# Altium PCB PCB1.PcbDoc (part 1 of 2)
Units mm, origin at the board's own origin, x right, y up, seen from the top; angles counter-clockwise.
Board outline 125 x 72.5 mm, 4 copper layers (Top Layer, GND Plane, 3V3_Plane, Bottom Layer), stack 0.603 mm thick; 52 components, 52 nets, 236 pads, 121 vias.
Unrouted connection lines stored in the file: 4.
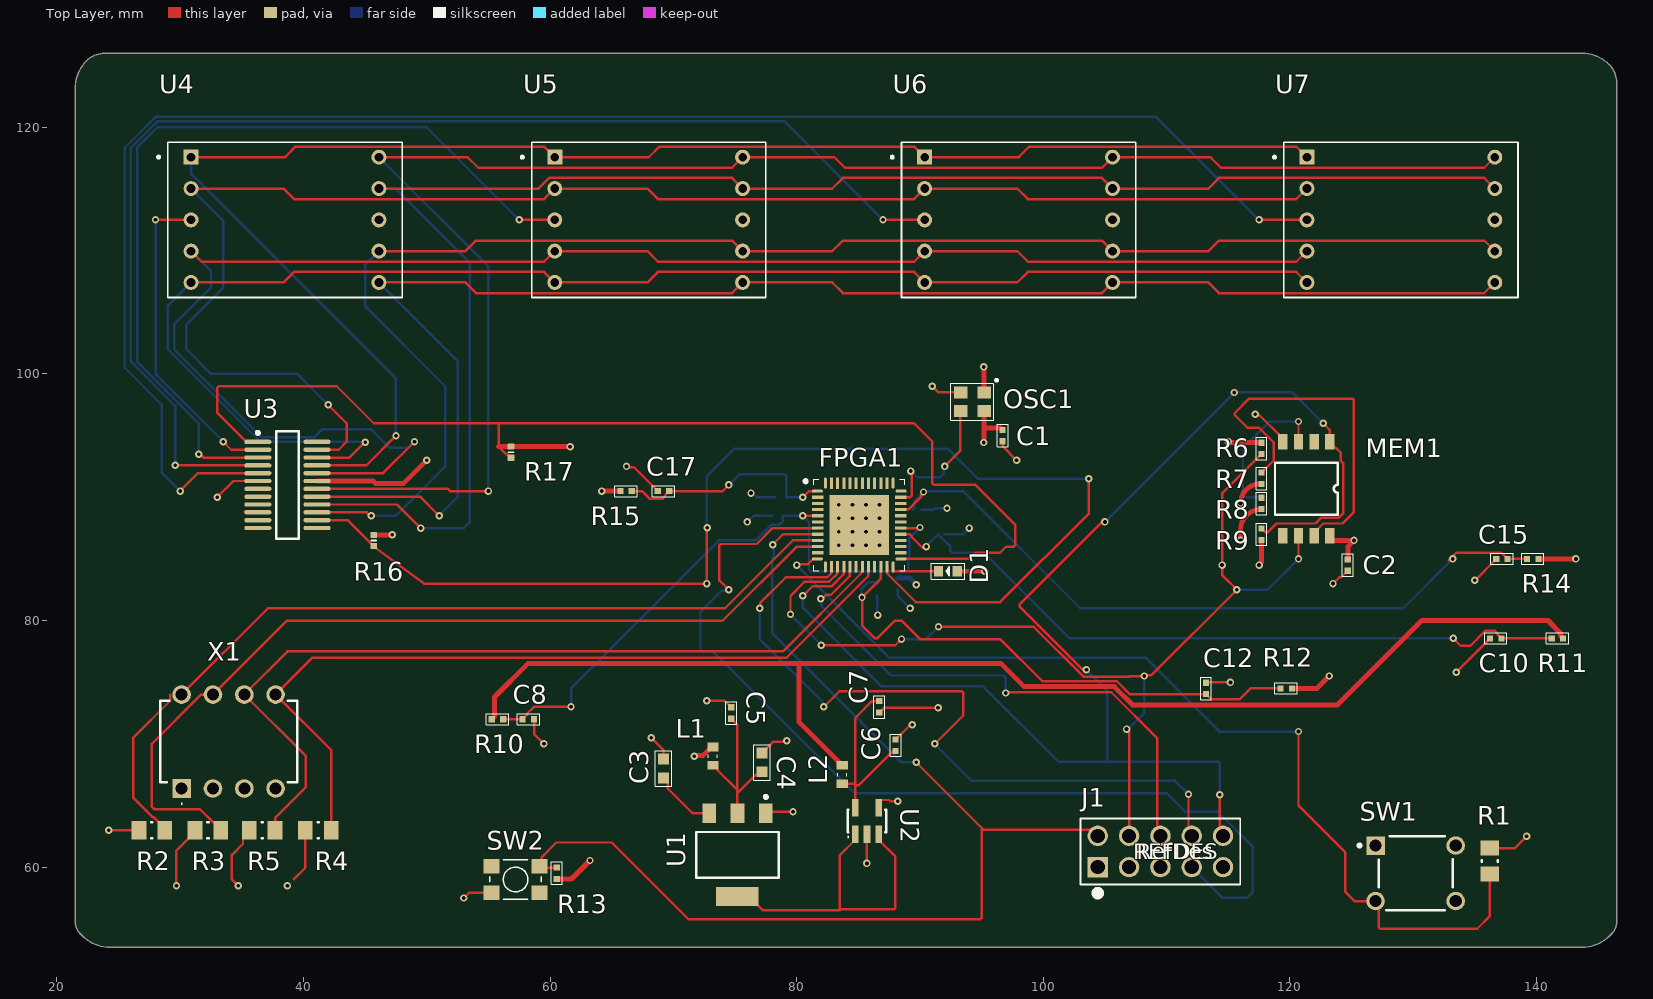
[diagram p0: Top Layer view]
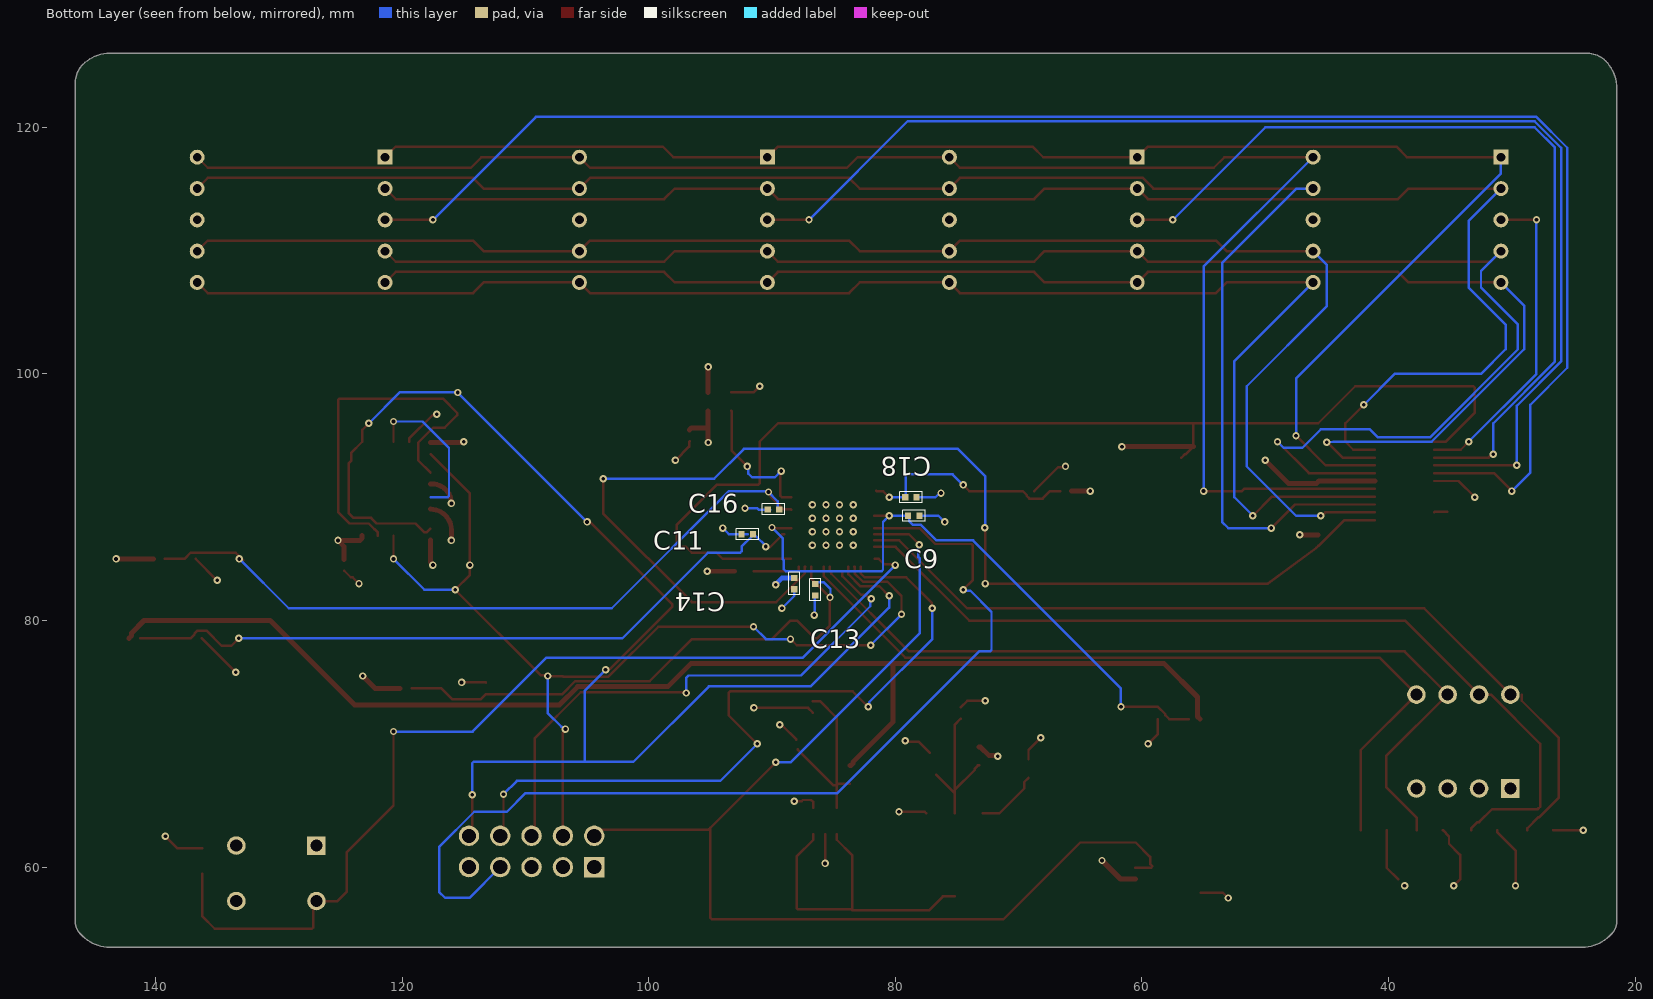
[diagram p1: Bottom Layer view, seen from below]
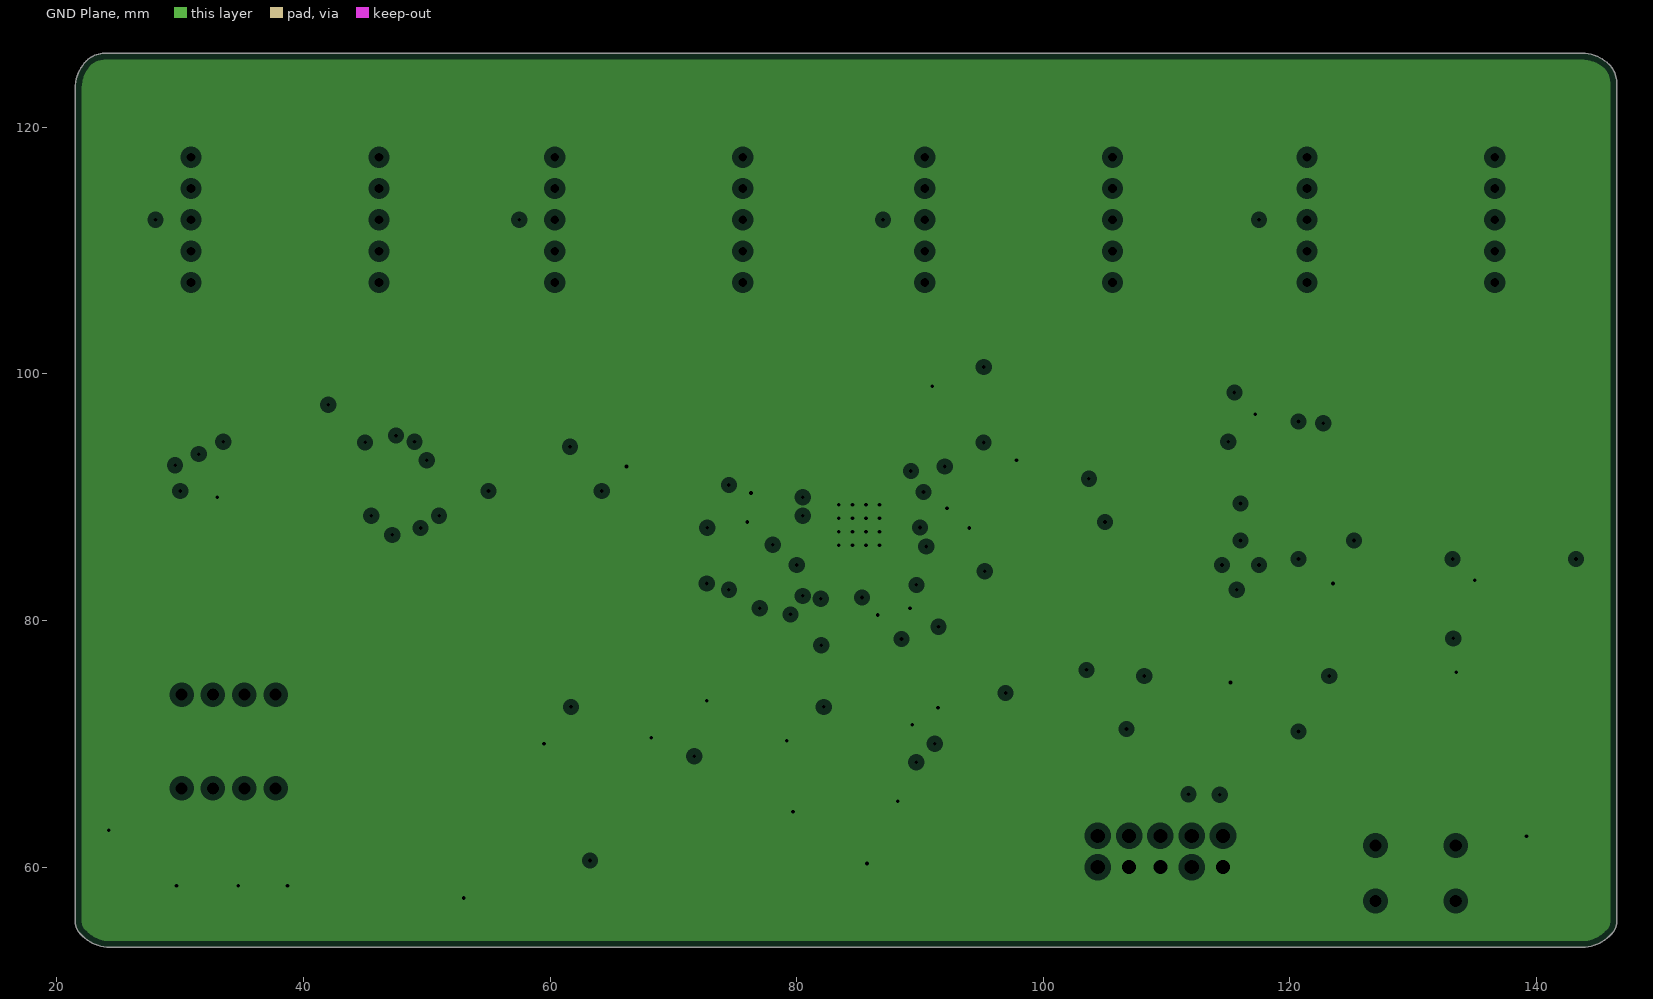
[diagram p2: GND Plane, clearances drawn from the general rule]
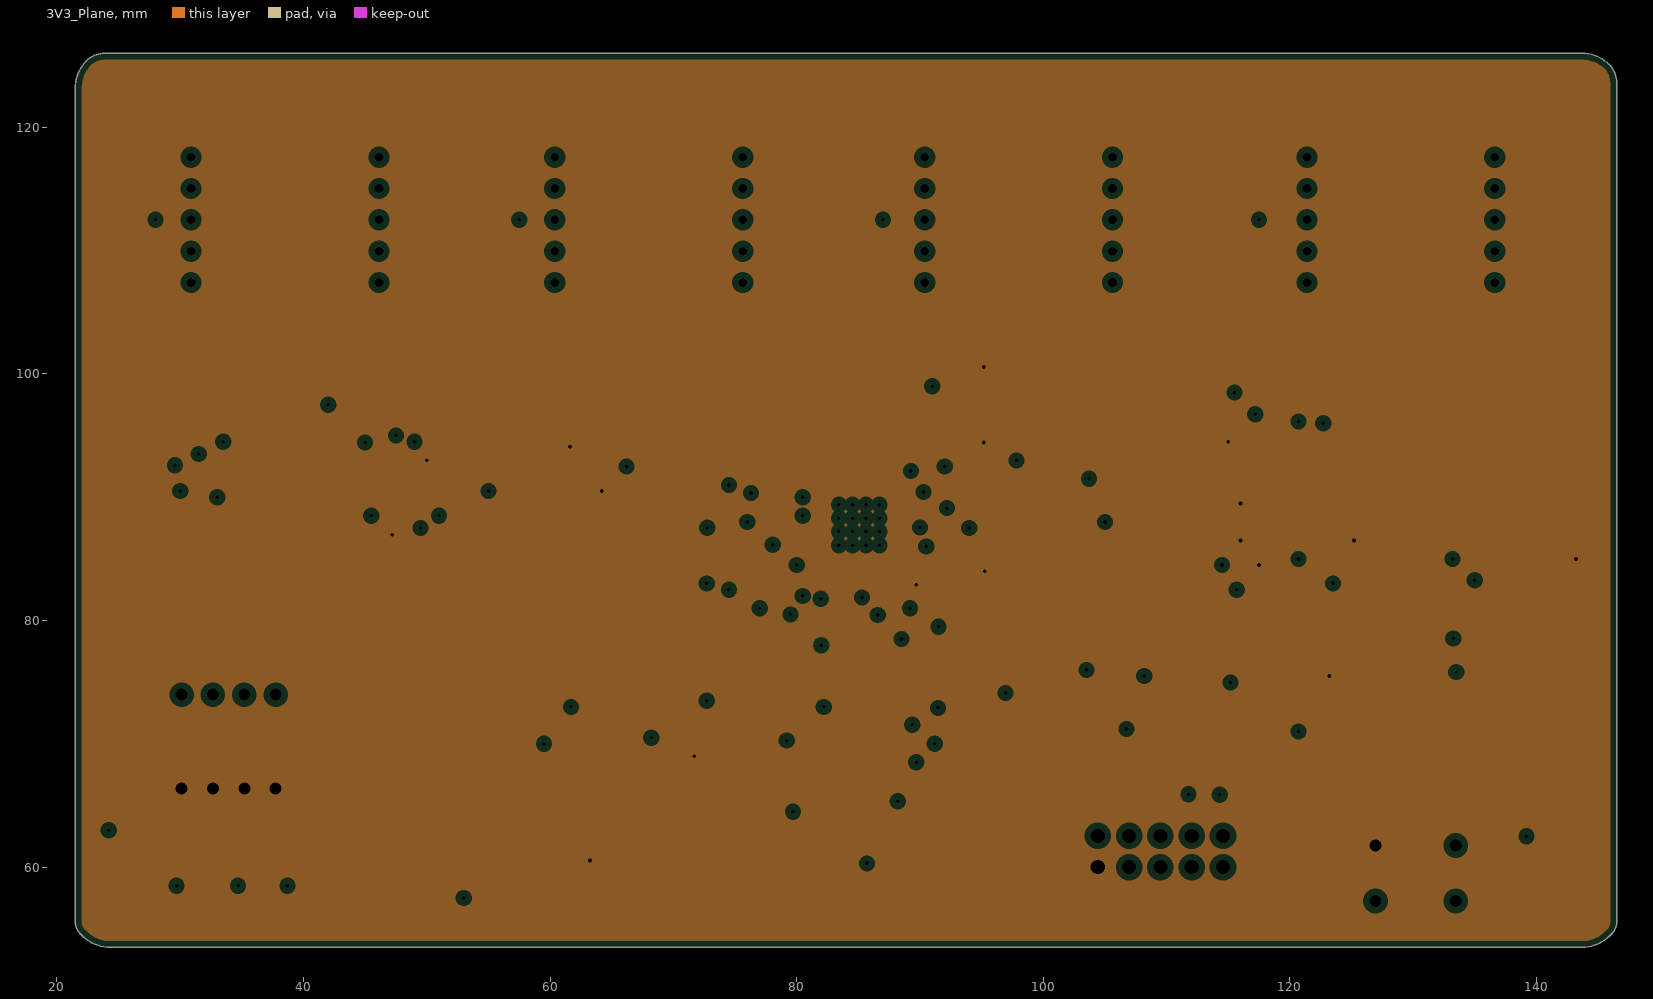
[diagram p3: 3V3_Plane, clearances drawn from the general rule]
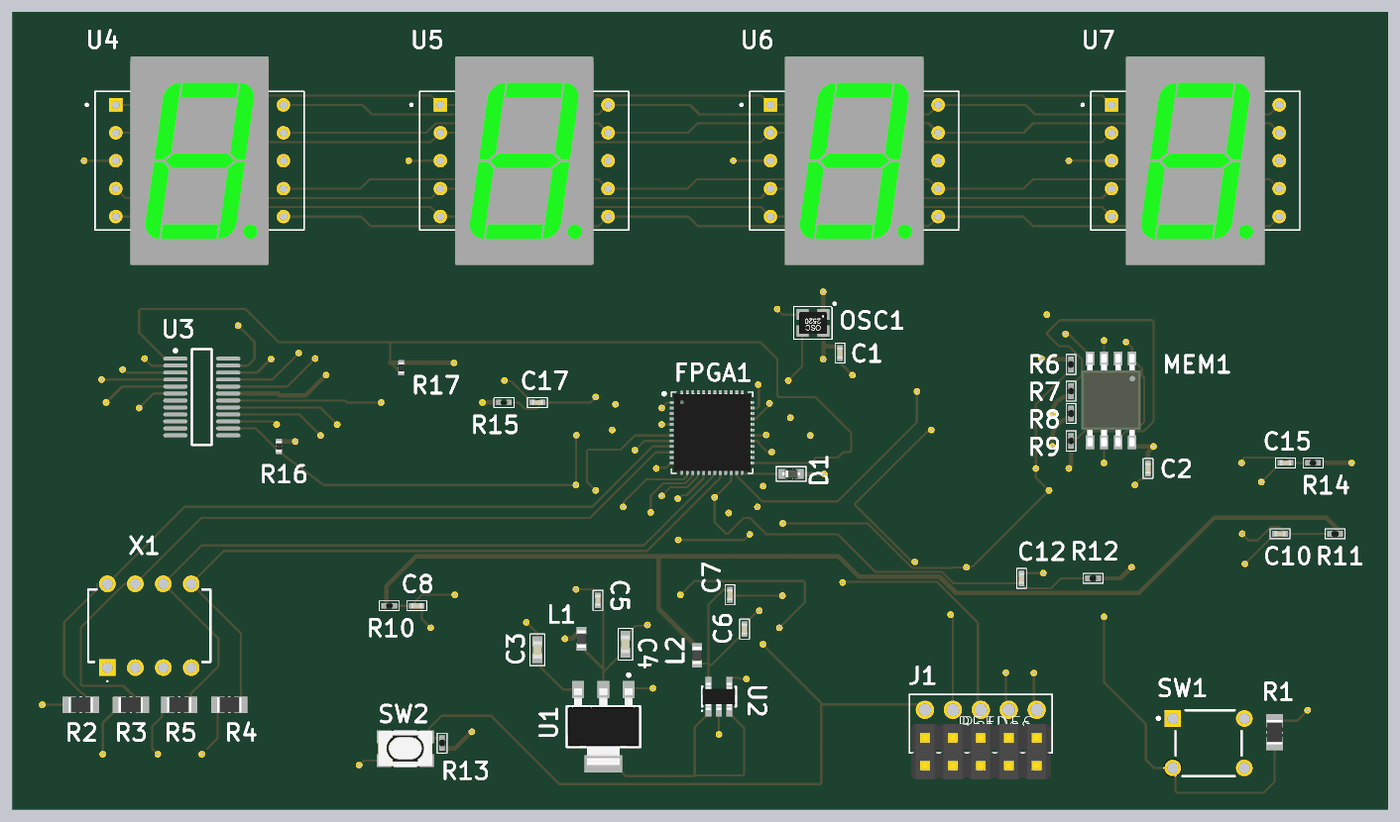
[diagram p4: 3D render of the assembled board from above, using the file's embedded part models]
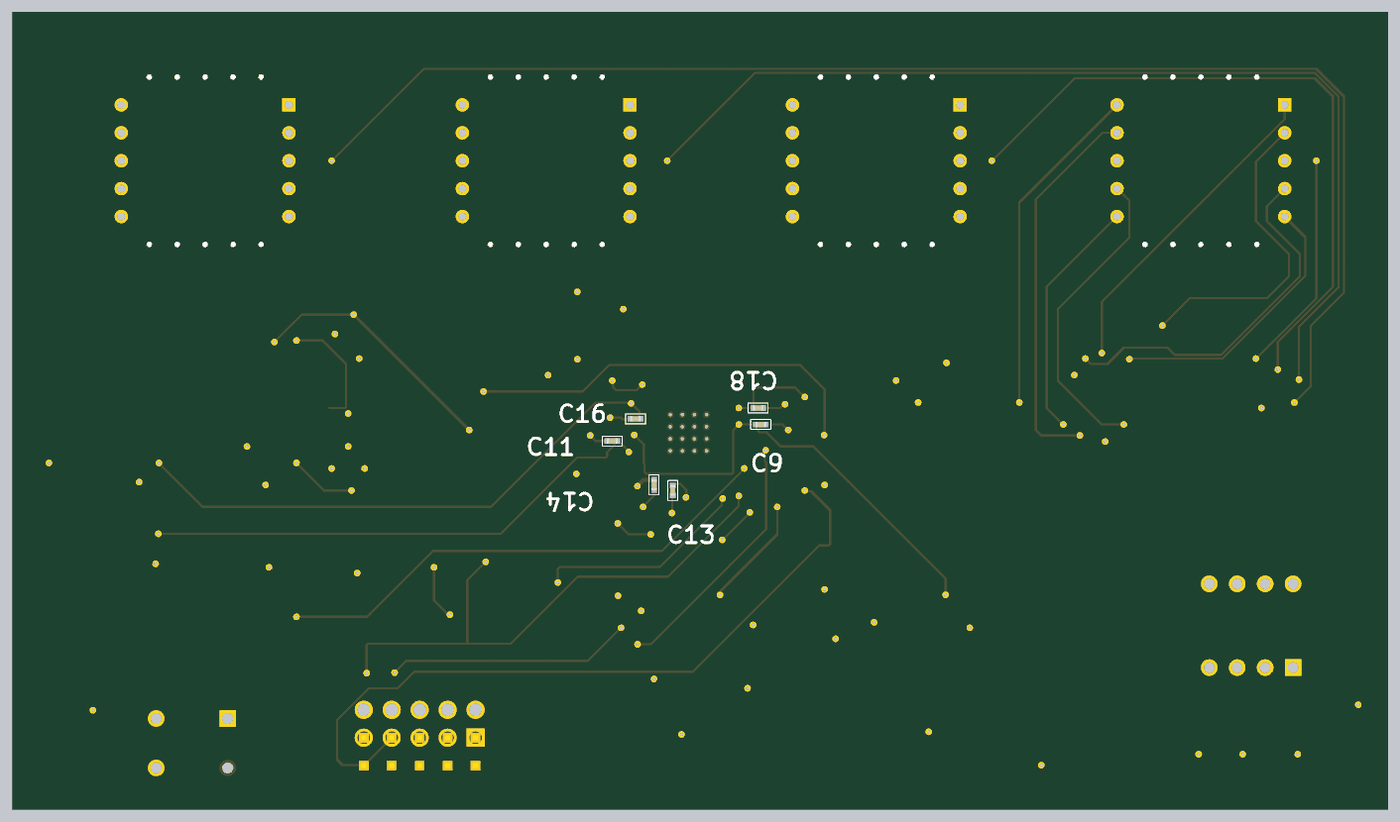
[diagram p5: 3D render of the assembled board from below, using the file's embedded part models]

## Layer stack, top to bottom
Top Solder: solder mask 0.0102, Solder Resist, Dk 3.5
Top Layer: signal copper 0.0356
Dielectric 2: prepreg 0.0711, PP-006, Dk 4.1
GND Plane: plane copper 0.035, net GND
Dielectric 1: dielectric 0.32, FR-4, Dk 4.8
3V3_Plane: plane copper 0.035, net +3.3V
Dielectric 3: prepreg 0.0711, PP-006, Dk 4.1
Bottom Layer: signal copper 0.0356
Bottom Solder: solder mask 0.0102, Solder Resist, Dk 3.5

## Board outline
22.102,54.398 ccw(c24.27,56.566) 24.27,53.5 143.73,53.5 ccw(c143.73,56.566) 145.898,54.398 146.146,54.646 ccw(c145.293,55.5) 146.5,55.5 146.5,101 146.5,123.649 ccw(c144.445,123.649) 145.898,125.102 ccw(c143.73,122.934) 143.73,126 23.851,126 ccw(c23.851,123.945) 22.398,125.398 ccw(c24.566,123.23) 21.5,123.23 21.5,55.5 ccw(c22.707,55.5) 21.854,54.646

## Design rules (kind name [scope] priority, off if disabled: settings)
Clearance [All] p1: gap=0.15 ignorepadtopadclearanceinfootprint=TRUE
PlaneClearance [All] p1: clearance=0.508
PlaneConnect [All] p1: planeconnectstyle=Relief reliefexpansion=0.508 reliefentries=4 reliefconductorwidth=0.254 reliefairgap=0.254
PolygonConnect [All] p1: thpad.connectstyle=Relief thpad.reliefconductorwidth=0.25 thpad.reliefentries=4 thpad.polygonreliefangle="90 Angle" thpad.airgapwidth=0.25 smdpad.connectstyle=Relief smdpad.reliefconductorwidth=0.254 smdpad.reliefentries=4 smdpad.polygonreliefangle="90 Angle" smdpad.airgapwidth=0.254 via.connectstyle=Direct via.reliefconductorwidth=0.254 via.reliefentries=4 via.polygonreliefangle="90 Angle" via.airgapwidth=0.254
RoutingVias [All] p1: holewidth=0.3 width=0.6 viastyle="Through Hole" minholewidth=0.3 minwidth=0.6 maxholewidth=0.5 maxwidth=1
SolderMaskExpansion [All] p1: expansion=0 istentingtop=FALSE
SupplyNets "Schematic Supply Nets_10" [InNet('VCCIO_1')] p1: voltage=0.000
SupplyNets "Schematic Supply Nets_9" [InNet('VCC_1.2V')] p2: voltage=0.000
SupplyNets "Schematic Supply Nets_8" [InNet('+1.2V')] p3: voltage=0.000
SupplyNets "Schematic Supply Nets_7" [InNet('VCCIO_0')] p4: voltage=0.000
SupplyNets "Schematic Supply Nets_6" [InNet('VCC_PLL')] p5: voltage=0.000
SupplyNets "Schematic Supply Nets_5" [InNet('VCCIO_2')] p6: voltage=0.000
SupplyNets "Schematic Supply Nets_4" [InNet('GND')] p7: voltage=0.000
SupplyNets "Schematic Supply Nets_3" [InNet('VCC_3.3V')] p8: voltage=0.000
SupplyNets "Schematic Supply Nets_2" [InNet('VCC')] p9: voltage=0.000
SupplyNets "Schematic Supply Nets_1" [InNet('+3.3V')] p10: voltage=0.000
SupplyNets "Schematic Supply Nets" [InNet('5V')] p11: voltage=0.000
Width "Power Width" [InNet('+3.3V') OR InNet('+1.2V')] p1: maxlimit=0.65 minlimit=0.3 preferedwidth=0.4
Width [All] p2: maxlimit=0.3 minlimit=0.15 preferedwidth=0.2
28 further rules are at their usual default settings.

## Classes and differential pairs
component class Misc: C2 C3 C4 C5 C6 C7 L1 L2 MEM1 R6 R7 R8 R9 U1 U2
component class CLOCKANDSWITCH: C1 J1 OSC1 R1 R2 R3 R4 R5 SW1 X1
component class FPGA: C8 C9 C10 C11 C12 C13 C14 C15 C16 C17 C18 D1 FPGA1 R10 R11 R12 R13 R14 R15 SW2
component class 7seg: R16 R17 U3 U4 U7

## Components (designator, comment, footprint, x,y, rotation, side; value= is the part's Value field where it differs from the comment)
C1 "Cap Semi" C0402 96.698,95 r180 top value=0.1uF
C2 "Cap Semi" C0402 124.698,84.5 r180 top value=1uF
C3 "Cap" C0603 69.198,68 r0 top value=1uF
C4 "Cap" C0603 77.198,68.5 r0 top value=1uF
C5 "Cap" C0402 74.698,72.5 r0 top value=0.1uF
C6 "Cap" C0402 88.022,69.885 r0 top value=1uF
C7 "Cap" C0402 86.698,73 r180 top value=0.1uF
C8 "Cap Semi" C0402 58.236,72 r270 top value=1uF
C9 "Cap Semi" C0402 78.5,88.5 r270 bottom value=0.1uF
C10 "Cap Semi" C0402 136.698,78.555 r90 top value=1uF
C11 "Cap Semi" C0402 92,87 r90 bottom value=0.1uF
C12 "Cap Semi" C0402 113.198,74.5 r0 top value=1uF
C13 "Cap Semi" C0402 86.5,82.5 r0 bottom value=0.1uF
C14 "Cap Semi" C0402 88.198,83 r0 bottom value=0.1uF
C15 "Cap Semi" C0402 137.198,85 r90 top value=1uF
C16 "Cap Semi" C0402 89.882,89.012 r90 bottom value=0.1uF
C17 "Cap Semi" C0402 69.198,90.5 r90 top value=1uF
C18 "Cap Semi" C0402 78.736,90 r270 bottom value=0.1uF
D1 "CDBU0520" CDBU0520 92.262,84 r180 top
FPGA1 "iCE40-UP5K" SLAB-QFN48-7X7-MD 85.073,87.75 r0 top
J1 "TSW-105-07-F-D" TSW-105-07-G-D_SAI 104.42,60 r0 top
L1 "600 OHM 800MA" J1-0603 73.198,69 r270 top value=10mH
L2 "600 OHM 800MA" J1-0603 83.698,67.5 r270 top value=10mH
MEM1 "FlashMemory" SOP8FlashCorrect 123.238,94.5 r270 top
OSC1 "MEMS SiT1602" oscMEMS1602 95.198,97 r180 top
R1 "Resistor 10k +/-1% 0805 125 mW" RESC2013X50X35ML15T15 136.198,60.5 r90 top value=10k
R2 "Resistor 10k +/-1% 0805 125 mW" RESC2013X50X35ML15T15 27.698,63 r180 top value=10k
R3 "Resistor 10k +/-1% 0805 125 mW" RESC2013X50X35ML15T15 32.248,63 r180 top value=10k
R4 "Resistor 10k +/-1% 0805 125 mW" RESC2013X50X35ML15T15 41.198,63 r180 top value=10k
R5 "Resistor 10k +/-1% 0805 125 mW" RESC2013X50X35ML15T15 36.644,63 r180 top value=10k
R6 "Res3" R0402 117.698,93.963 r180 top value=10K
R7 "Res3" R0402 117.698,91.537 r0 top value=10K
R8 "Res3" R0402 117.698,89.5 r0 top value=10K
R9 "Res3" R0402 117.698,87 r0 top value=10K
R10 "Res3" R0402 55.736,72 r90 top value=1
R11 "Res3" R0402 141.698,78.555 r270 top value=1
R12 "Res3" R0402 119.698,74.5 r90 top value=1
R13 "Res3" R0402 60.537,59.513 r0 top value=10K
R14 "Res3" R0402 139.698,85 r270 top value=1
R15 "Res3" R0402 66.161,90.5 r270 top value=1
R16 "Resistor 4K7  +/-1 % 0402 63 mW" RESC0402(1005)_L 45.698,86.5 r90 top value=4.7k
R17 "Resistor 4K7  +/-1 % 0402 63 mW" RESC0402(1005)_L 56.821,93.654 r90 top value=4.7k
SW1 "B3F-1000" OMRON-B3F-1000-4_V 130.198,59.5 r0 top
SW2 "311020045" SW4-SMD-4.2X3.2X2.5MM 57.198,59 r0 top
U1 "TLV1117LV33" ZZ311 75.198,61 r180 top
U2 "LP5907MFX-1.2" 1-2Regulator 85.698,64 r0 top
U3 "AS1115-BSST" AMS-QSOP-24-8645X3900DE_N 38.698,91 r0 top
U4 "LDSC512RI" LED_LDSC512RI 38.5,112.5 r0 top
U5 "LDSC512RI" LED_LDSC512RI 68,112.5 r0 top
U6 "LDSC512RI" LED_LDSC512RI 98,112.5 r0 top
U7 "LDSC512RI" LED_LDSC512RI 129,112.5 r0 top
X1 "NDI04HV" NDI04HV 30.118,66.38 r0 top

## Footprints (in the part's own frame and the unit in brackets; to place one, negate y for a bottom-side part, rotate by r counter-clockwise, add the part's x,y. Pads: shape width x height; smd on the part's side, far side on the other; paste and mask are expansions set on the pad)
1-2Regulator [mm]
  rect 0.55x1.45 smd: 1(-0.95,-1.329) 2(0,-1.329) 3(0.95,-1.329) 4(0.95,0.821) 5(-0.95,0.821)
  silkscreen extent -1.57,-1.6 1.55,0.65, body extent -1.5,-1.5 1.5,1, height 1.08
AMS-QSOP-24-8645X3900DE_N [mm] "SOP, 24-Leads, Body 8.645x3.9mm, Pitch 0.635mm, IPC Medium Density"
  oval 2.2x0.35 smd: 1(-2.4,3.492) 2(-2.4,2.857) 3(-2.4,2.222) 4(-2.4,1.587) 5(-2.4,0.953) 6(-2.4,0.318) 7(-2.4,-0.318) 8(-2.4,-0.953) 9(-2.4,-1.587) 10(-2.4,-2.222) 11(-2.4,-2.857) 12(-2.4,-3.492) 13(2.4,-3.492) 14(2.4,-2.857) 15(2.4,-2.222) 16(2.4,-1.587) 17(2.4,-0.953) 18(2.4,-0.318) 19(2.4,0.318) 20(2.4,0.953) 21(2.4,1.587) 22(2.4,2.222) 23(2.4,2.857) 24(2.4,3.492)
  silkscreen extent -2.52,-4.35 0.9,4.35, body extent -2,-4.35 2,4.35, height 1.75
C0402 [mm]
  rect 0.5x0.5 smd: 1(0,0.463) 2(0,-0.463)
  silkscreen extent -0.45,-0.91 0.45,0.91, body extent -0.25,-0.5 0.25,0.5, height 0.48
C0603 [mil]
  rect 35x35 smd: 1(0,30) 2(0,-30)
  silkscreen extent -26,-57 26,57, body extent -16,-31 16,32, height 31
CDBU0520 [mil]
  rect 30x35 smd: +(-30,0) -(30,0)
  silkscreen extent -54,-26 54,26, body extent -32,-16 31,16, height 28
J1-0603 [mm] "Chip Resistor, Body 1.6x0.8mm, IPC High Density"
  rect 0.7x0.9 smd: 1(-0.75,0) 2(0.75,0)
  silkscreen extent -0.12,-0.35 0.12,0.35, body extent -0.79,-0.39 0.81,0.41, height 0.78
LED_LDSC512RI [mm]
  rect 1.218x1.218 / inner round 1.218 / far side rect 1.218x1.218 hole 0.71: 1(-7.62,5.08)
  round 1.218 hole 0.71: 2(-7.62,2.54) 3(-7.62,0) 4(-7.62,-2.54) 5(-7.62,-5.08) 6(7.62,-5.08) 7(7.62,-2.54) 8(7.62,0) 9(7.62,2.54) 10(7.62,5.08)
  silkscreen extent -10.35,-6.3 9.5,6.3, body extent -6.3,-9.5 6.3,9.5, height 8
NDI04HV [mm]
  rect 1.509x1.509 hole 0.97: 1(0,0)
  round 1.509 hole 0.97: 2(2.54,0) 3(5.08,0) 4(7.62,0) 5(7.62,7.62) 6(5.08,7.62) 7(2.54,7.62) 8(0,7.62)
  silkscreen extent -1.74,-1.29 9.36,7.11
OMRON-B3F-1000-4_V [mm] "TH, 4-Leads, Body 6x6mm"
  rect 1.5x1.5 hole 1 paste-2539.97: 1(-3.25,2.25)
  round 1.5 hole 1 paste-2539.97: 2(3.25,2.25) 4(3.25,-2.25)
  round 1.5 hole 1 paste-2539.97 mask+0.102: 3(-3.25,-2.25)
  silkscreen extent -4.67,-3 3,3, body extent -3.4,-3 3.4,3, height 4.5
oscMEMS1602 [mm]
  rect 1.1x1 smd: 1(0,-1.5) 2(1.9,-1.5) 3(1.9,0) 4(0,0)
  silkscreen extent -1.09,-2.56 2.69,0.74, body extent -0.31,-1.74 2.19,0.26, height 0.86
R0402 [mm]
  rect 0.5x0.5 smd: 1(0,0.463) 2(0,-0.463)
  silkscreen extent -0.45,-0.91 0.45,0.91, body extent -0.17,-0.5 0.18,0.5, height 0.49
RESC0402(1005)_L [mm] "Chip Resistor, Body 1.0x0.5mm, IPC High Density"
  rrect25% 0.5x0.55 smd: 1(-0.45,0) 2(0.45,0)
  silkscreen extent 0,-0.2 0,0.2, body extent -0.5,-0.25 0.5,0.25, height 0.3
RESC2013X50X35ML15T15 [mm] "Chip Resistor, 2-Leads, Body 2.2x1.4mm, IPC Low Density"
  rect 1.2x1.5 smd: 1(-1.05,0) 2(1.05,0)
  silkscreen extent -0.05,-0.65 0.05,0.65, body extent -1.1,-0.7 1.1,0.7, height 0.5
SLAB-QFN48-7X7-MD [mm] "QFN, 48-Leads, Body 7.00x7.00mm, Pitch 0.50mm, Thermal Pad 4.70x4.70mm, IPC Medium Density"
  rect 4.85x4.85 smd: 0(0,0)
  oval 0.9x0.25 smd: 1(-3.4,2.75) 12(-3.4,-2.75) 25(3.4,-2.75) 36(3.4,2.75)
  rect 0.95x0.25 smd: 2(-3.375,2.25) 3(-3.375,1.75) 4(-3.375,1.25) 5(-3.375,0.75) 6(-3.375,0.25) 7(-3.375,-0.25) 8(-3.375,-0.75) 9(-3.375,-1.25) 10(-3.375,-1.75) 11(-3.375,-2.25) 26(3.375,-2.25) 27(3.375,-1.75) 28(3.375,-1.25) 29(3.375,-0.75) 30(3.375,-0.25) 31(3.375,0.25) 32(3.375,0.75) 33(3.375,1.25) 34(3.375,1.75) 35(3.375,2.25)
  oval 0.25x0.9 smd: 13(-2.75,-3.4) 24(2.75,-3.4) 37(2.75,3.4) 48(-2.75,3.4)
  rect 0.25x0.95 smd: 14(-2.25,-3.375) 15(-1.75,-3.375) 16(-1.25,-3.375) 17(-0.75,-3.375) 18(-0.25,-3.375) 19(0.25,-3.375) 20(0.75,-3.375) 21(1.25,-3.375) 22(1.75,-3.375) 23(2.25,-3.375) 38(2.25,3.375) 39(1.75,3.375) 40(1.25,3.375) 41(0.75,3.375) 42(0.25,3.375) 43(-0.25,3.375) 44(-0.75,3.375) 45(-1.25,3.375) 46(-1.75,3.375) 47(-2.25,3.375)
  silkscreen extent -4.47,-3.7 3.7,3.7, body extent -3.49,-3.48 3.53,3.54, height 0.78
SOP8FlashCorrect [mil]
  rect 50x30 smd: 1(0,0) 2(0,-50) 3(0,-100) 4(0,-150) 5(299.84,-150) 6(299.84,-100) 7(299.84,-50) 8(299.84,0)
  silkscreen extent 67,-175 233,25, body extent -16,-181 314,31, height 91
SW4-SMD-4.2X3.2X2.5MM [mm]
  rect 1.3x1.15 smd: 1(-1.95,1.075) 2(1.95,1.075) 3(-1.95,-1.075) 4(1.95,-1.075)
  silkscreen extent -2.1,-1.6 2.1,1.6, body extent -2.46,-1.56 2.44,1.64, height 2.51
TSW-105-07-G-D_SAI [mil]
  rect 65x65 / inner round 60 / far side rect 65x65 hole 45 paste-99999 mask+0: 1(0,0)
  round 65 / inner round 60 / far side round 65 hole 45 paste-99999 mask+0: 2(0,100) 3(100,0) 4(100,100) 5(200,0) 6(200,100) 7(300,0) 8(300,100) 9(400,0) 10(400,100)
  silkscreen extent -55,-93 455,155, body extent -50,-150 450,50, height 330
ZZ311 [mm] "SOT-223/SC-73; 4 Leads; Body 6.7 x 7.3 mm, inc. leads (LxW max)"
  rect 1.1x1.55 smd: 1(-2.3,-3.375) 2(0,-3.375) 3(2.3,-3.375)
  rect 3.45x1.55 smd: 4(0,3.375)
  silkscreen extent -3.35,-4.82 3.35,1.85, body extent -3.25,-3.48 3.25,3.48, height 1.65

## Part data
C1 C9 C11 C13 C14 C16 C18: "Capacitor (Semiconductor SIM Model)", Manufacturer="Samsung Electro-Mechanics", Manufacturer Part Number=CL05B104KA5NNNC, Operating Temperature="-55°C ~ 125°C", Package / Case="0402 (1005 Metric)", Ratings=-, Supplier Part Number 1=1276-6720-1-ND, Temperature Coefficient=X7R, Tolerance=±10%, Voltage - Rated=25V, Applications="General Purpose", Category=Capacitors, ComponentLink1Description=http://www.samsungsem.com/kr/support/product-search/mlcc/CL05B104KA5NNNC.jsp, ComponentLink1URL=http://www.samsungsem.com/kr/support/product-search/mlcc/CL05B104KA5NNNC.jsp, Features=-, Height - Seated (Max)=-, LatestRevisionDate=29-May-2009, LatestRevisionNote="IPC-7351 Footprint Added.", Lead Spacing=-, Lead Style=-, Mounting Type="Surface Mount, MLCC", Notification="Current market demand for these product types have resulted in fluctuating and extending lead times. Lead times may differ.", PackageDescription="Chip Capacitor", PackageReference=C1206, Packaging="Cut Tape (CT)", Part Status=Active, Pricing 1="1=0.1, 10=0.071, 100=0.0317, 500=0.02262, 1000=0.01777, 2500=0.01616, 5000=0.01486 (USD)", Published=8-Jun-2000, Publisher="Altium Limited", RoHS="RoHS Compliant", Size / Dimension="0.039\" L x 0.020\" W (1.00mm x 0.50mm)", Stock 1=0, Supplier 1=Digi-Key, Thickness (Max)="0.022\" (0.55mm)"
C2 C8 C10 C12 C15 C17: "Capacitor (Semiconductor SIM Model)", Manufacturer="TDK Corporation", Manufacturer Part Number=CGB2A1JB1E105M033BC, Operating Temperature="-25°C ~ 85°C", Package / Case="0402 (1005 Metric)", Ratings=-, Supplier Part Number 1=445-12016-1-ND, Temperature Coefficient=JB, Tolerance=±20%, Voltage - Rated=25V, Applications="General Purpose", Category=Capacitors, ComponentLink1Description=https://product.tdk.com/info/en/catalog/datasheets/mlcc_commercial_lowprofile_en.pdf, ComponentLink1URL=https://product.tdk.com/info/en/catalog/datasheets/mlcc_commercial_lowprofile_en.pdf, Failure Rate=-, Features="Low Profile", Height - Seated (Max)=-, LatestRevisionDate=29-May-2009, LatestRevisionNote="IPC-7351 Footprint Added.", Lead Spacing=-, Lead Style=-, Mounting Type="Surface Mount, MLCC", Notification="Current market demand for these product types have resulted in fluctuating and extending lead times. Lead times may differ.", PackageDescription="Chip Capacitor", PackageReference=C1206, Packaging="Cut Tape (CT)", Part Status=Active, Pricing 1="1=0.25, 10=0.173, 100=0.0874, 500=0.0598, 1000=0.0529, 2500=0.0506, 5000=0.046 (USD)", Published=8-Jun-2000, Publisher="Altium Limited", RoHS="RoHS Compliant", Size / Dimension="0.039\" L x 0.020\" W (1.00mm x 0.50mm)", Stock 1=0, Supplier 1=Digi-Key, Thickness (Max)="0.013\" (0.33mm)"
C3 C4: library part "Cap Semi", "Capacitor (Semiconductor SIM Model)", Manufacturer=Yageo, Manufacturer Part Number=CC0603KRX5R8BB105, Operating Temperature="-55°C ~ 85°C", Package / Case="0603 (1608 Metric)", Ratings=-, Supplier Part Number 1=311-1445-1-ND, Temperature Coefficient=X5R, Tolerance=±10%, Voltage - Rated=25V, Applications="General Purpose", Category=Capacitors, ComponentLink1Description=http://www.yageo.com/documents/recent/UPY-GPHC_X5R_4V-to-50V_25.pdf, ComponentLink1URL=http://www.yageo.com/documents/recent/UPY-GPHC_X5R_4V-to-50V_25.pdf, Failure Rate=-, Features=-, Height - Seated (Max)=-, LatestRevisionDate=29-May-2009, LatestRevisionNote="IPC-7351 Footprint Added.", Lead Spacing=-, Lead Style=-, Mounting Type="Surface Mount, MLCC", Notification="Current market demand for these product types have resulted in fluctuating and extending lead times. Lead times may differ.", PackageDescription="Chip Capacitor", PackageReference=C1206, Packaging="Cut Tape (CT)", Part Status=Active, Pricing 1="1=0.25, 10=0.179, 100=0.0843, 500=0.05908, 1000=0.04891 (USD)", Published=8-Jun-2000, Publisher="Altium Limited", RoHS="RoHS Compliant", Size / Dimension="0.063\" L x 0.031\" W (1.60mm x 0.80mm)", Stock 1=40000, Supplier 1=Digi-Key, Thickness (Max)="0.035\" (0.90mm)"
C5 C7: library part "Cap Semi", "Capacitor (Semiconductor SIM Model)", Manufacturer="Samsung Electro-Mechanics", Manufacturer Part Number=CL05B104KA5NNNC, Operating Temperature="-55°C ~ 125°C", Package / Case="0402 (1005 Metric)", Ratings=-, Supplier Part Number 1=1276-6720-1-ND, Temperature Coefficient=X7R, Tolerance=±10%, Voltage - Rated=25V, Applications="General Purpose", Category=Capacitors, ComponentLink1Description=http://www.samsungsem.com/kr/support/product-search/mlcc/CL05B104KA5NNNC.jsp, ComponentLink1URL=http://www.samsungsem.com/kr/support/product-search/mlcc/CL05B104KA5NNNC.jsp, Features=-, Height - Seated (Max)=-, LatestRevisionDate=29-May-2009, LatestRevisionNote="IPC-7351 Footprint Added.", Lead Spacing=-, Lead Style=-, Mounting Type="Surface Mount, MLCC", Notification="Current market demand for these product types have resulted in fluctuating and extending lead times. Lead times may differ.", PackageDescription="Chip Capacitor", PackageReference=C1206, Packaging="Cut Tape (CT)", Part Status=Active, Pricing 1="1=0.1, 10=0.071, 100=0.0317, 500=0.02262, 1000=0.01777, 2500=0.01616, 5000=0.01486 (USD)", Published=8-Jun-2000, Publisher="Altium Limited", RoHS="RoHS Compliant", Size / Dimension="0.039\" L x 0.020\" W (1.00mm x 0.50mm)", Stock 1=0, Supplier 1=Digi-Key, Thickness (Max)="0.022\" (0.55mm)"
C6: library part "Cap Semi", "Capacitor (Semiconductor SIM Model)", Manufacturer="TDK Corporation", Manufacturer Part Number=CGB2A1JB1E105M033BC, Operating Temperature="-25°C ~ 85°C", Package / Case="0402 (1005 Metric)", Ratings=-, Supplier Part Number 1=445-12016-1-ND, Temperature Coefficient=JB, Tolerance=±20%, Voltage - Rated=25V, Applications="General Purpose", Category=Capacitors, ComponentLink1Description=https://product.tdk.com/info/en/catalog/datasheets/mlcc_commercial_lowprofile_en.pdf, ComponentLink1URL=https://product.tdk.com/info/en/catalog/datasheets/mlcc_commercial_lowprofile_en.pdf, Failure Rate=-, Features="Low Profile", Height - Seated (Max)=-, LatestRevisionDate=29-May-2009, LatestRevisionNote="IPC-7351 Footprint Added.", Lead Spacing=-, Lead Style=-, Mounting Type="Surface Mount, MLCC", Notification="Current market demand for these product types have resulted in fluctuating and extending lead times. Lead times may differ.", PackageDescription="Chip Capacitor", PackageReference=C1206, Packaging="Cut Tape (CT)", Part Status=Active, Pricing 1="1=0.25, 10=0.173, 100=0.0874, 500=0.0598, 1000=0.0529, 2500=0.0506, 5000=0.046 (USD)", Published=8-Jun-2000, Publisher="Altium Limited", RoHS="RoHS Compliant", Size / Dimension="0.039\" L x 0.020\" W (1.00mm x 0.50mm)", Stock 1=0, Supplier 1=Digi-Key, Thickness (Max)="0.013\" (0.33mm)"
D1: "DIODE SCHOTTKY 20V 500MA 0603", Capacitance @ Vr, F="100pF @ 0V, 1MHz", Current - Average Rectified (Io)=500mA, Manufacturer="Comchip Technology", Operating Temperature - Junction="125°C (Max)", Package / Case="2-SMD, No Lead", Supplier Device Package=0603/SOD-523F, Supplier Part Number 1=641-1332-1-ND, Base Part Number=CDBU0520, Category="Discrete Semiconductor Products", ComponentLink1Description=http://www.comchiptech.com/admin/files/product/CDBU0520-HF-RevA797161.pdf, ComponentLink1URL=http://www.comchiptech.com/admin/files/product/CDBU0520-HF-RevA797161.pdf, Diode Type=Schottky, Manufacturer Part Number=CDBU0520, Mounting Type="Surface Mount", Packaging="Cut Tape (CT)", Part Status=Active, Pricing 1="1=0.47, 10=0.333, 100=0.2186, 500=0.12916, 1000=0.09935 (USD)", RoHS="RoHS Compliant", Speed="Fast Recovery =< 500ns, > 200mA (Io)", Stock 1=262344, Supplier 1=Digi-Key
FPGA1: library part "iCE40-UP5K FPGA", "iCE40-UP5K FPGA", Manufacturer="Lattice Semiconductor Corporation", Manufacturer Part Number=ICE40UP5K-SG48ITR50, Operating Temperature="-40°C ~ 100°C (TJ)", Package / Case="48-VFQFN Exposed Pad", Supplier Device Package="48-QFN (7x7)", Supplier Part Number 1=220-2145-1-ND, Voltage - Supply="1.14 V ~ 1.26 V", Category="Integrated Circuits (ICs)", ComponentLink1Description=http://www.latticesemi.com/view_document?document_id=51968, ComponentLink1URL=http://www.latticesemi.com/view_document?document_id=51968, Mounting Type="Surface Mount", Part Status="Discontinued at Digi-Key", Pricing 1="1=6.06 (USD)", RoHS="RoHS Compliant", Stock 1=514, Supplier 1=Digi-Key
J1: library part CMP-007-000000-1, "Description", Manufacturer_Name="Samtec Inc", Copyright="Copyright (C) 2025 Ultra Librarian. All rights reserved.", Design Item ID=TSW-105-07-F-D, Manufacturer_Part_Number=TSW-105-07-F-D, RefDes=RefDes, Source=TSW-105-07-F-D.SchLib, Type=Type
L1 L2: library part Inductor, "Inductor", Current Rating (Max)=800mA, DC Resistance (DCR) (Max)="250 mOhm", Manufacturer="Murata Electronics North America", Manufacturer Part Number=BLM18HE601SN1D, Operating Temperature="-55°C ~ 125°C", Package / Case="0603 (1608 Metric)", Ratings=-, Supplier Part Number 1=490-5214-1-ND, Category=Filters, Code_IEC=1005, Code_JEITA=0402, ComponentLink1Description=https://www.murata.com/en-us/products/productdata/8796741599262/ENFA0004.pdf, ComponentLink1URL=https://www.murata.com/en-us/products/productdata/8796741599262/ENFA0004.pdf, Filter Type="Signal Line", Height (Max)="0.037\" (0.95mm)", LatestRevisionDate=29-May-2009, LatestRevisionNote="IPC-7351 Footprint Added.", Mounting Type="Surface Mount", PackageDescription="Chip Inductor", PackageReference=0402-A, Packaging="Cut Tape (CT)", Part Status=Active, Pricing 1="1=0.22, 10=0.179, 25=0.1392, 50=0.1154, 100=0.0996, 250=0.07964, 500=0.07168, 1000=0.05973 (USD)", Published=8-Jun-2000, Publisher="Altium Limited", RoHS="RoHS Compliant", Size / Dimension="0.063\" L x 0.032\" W (1.60mm x 0.80mm)", Stock 1=152784, Supplier 1=Digi-Key
MEM1: library part W25Q32JVSSIQ, "IC FLASH 32M SPI 133MHZ 8SOIC", Manufacturer="Winbond Electronics", Operating Temperature="-40°C ~ 85°C (TA)", Package / Case="8-SOIC (0.209\", 5.30mm Width)", Supplier Device Package=8-SOIC, Supplier Part Number 1=W25Q32JVSSIQ-ND, Voltage - Supply="2.7 V ~ 3.6 V", Category="Integrated Circuits (ICs)", ComponentLink1Description=http://www.winbond.com/resource-files/w25q32jv%20revg%2003272018%20plus.pdf, ComponentLink1URL=http://www.winbond.com/resource-files/w25q32jv%20revg%2003272018%20plus.pdf, Manufacturer Part Number=W25Q32JVSSIQ, Memory Format=FLASH, Memory Interface="SPI - Quad I/O", Memory Size="32Mb (4M x 8)", Memory Type=Non-Volatile, Mounting Type="Surface Mount", Packaging=Tube, Part Status=Active, Pricing 1="1=0.81, 10=0.74, 25=0.7308, 90=0.72667, 180=0.64972, 270=0.64411, 540=0.63474, 810=0.62498, 1080=0.61183 (USD)", RoHS="RoHS Compliant", Stock 1=41181, Supplier 1=Digi-Key, Technology="FLASH - NOR", Write Cycle Time - Word, Page=3ms
OSC1: library part SIT1602AC-13-33E-12.000000G, "MEMS OSC XO 12.0000MHZ LVCMOS", Current - Supply (Disable) (Max)=4mA, Current - Supply (Max)=4.5mA, Frequency Stability=±50ppm, Manufacturer=SiTIME, Operating Temperature="-20°C ~ 70°C", Package / Case="4-SMD, No Lead", Ratings=-, Supplier Part Number 1=1473-1051-1-ND, Voltage - Supply=3.3V, Base Resonator=MEMS, Category="Crystals, Oscillators, Resonators", ComponentLink1Description=https://media.digikey.com/pdf/Data%20Sheets/SiTime%20PDFs/SIT1602A.pdf, ComponentLink1URL=https://media.digikey.com/pdf/Data%20Sheets/SiTime%20PDFs/SIT1602A.pdf, Function=Enable/Disable, Height - Seated (Max)="0.032\" (0.80mm)", Manufacturer Part Number=SIT1602AC-13-33E-12.000000G, Mounting Type="Surface Mount", Output=LVCMOS, Packaging="Cut Tape (CT)", Part Status="Not For New Designs", Pricing 1="1=1.26, 10=1.118, 50=1.045, 100=0.9236 (USD)", RoHS="RoHS Compliant", Size / Dimension="0.098\" L x 0.079\" W (2.50mm x 2.00mm)", Supplier 1=Digi-Key, Type="XO (Standard)"
R1 R2 R3 R4 R5: library part CMP-009-00018-5, "Chip Resistor, 10 KOhm, +/- 1%, 125 mW, -55 to 155 degC, 0805 (2012 Metric)", Case/Package=0805, Max Operating Temperature=155°C, Min Operating Temperature=-55°C, Power=125mW, Tolerance=1%, Voltage Rating=150V, Mounting Technology=SM, Pins=2, RoHS Compliant=True
R6 R7 R8 R9 R13: "Resistor", Manufacturer=Yageo, Manufacturer Part Number=RC0402JR-0710KP, Operating Temperature="-55°C ~ 155°C", Package / Case="0402 (1005 Metric)", Power (Watts)="0.063W, 1/16W", Supplier Device Package=0402, Supplier Part Number 1=YAG1281CT-ND, Temperature Coefficient=±150ppm/°C, Tolerance=±5%, Category=Resistors, ComponentLink1Description=http://www.yageo.com/NewPortal/yageodocoutput?fileName=/pdf/R-Chip/PYu-RC_51_RoHS_P_0.pdf, ComponentLink1URL=http://www.yageo.com/NewPortal/yageodocoutput?fileName=/pdf/R-Chip/PYu-RC_51_RoHS_P_0.pdf, Composition="Thick Film", Failure Rate=-, Features="Moisture Resistant", Height - Seated (Max)="0.016\" (0.40mm)", LatestRevisionDate=29-May-2009, LatestRevisionNote="IPC-7351 Footprint Added.", PackageDescription="Chip Resistor", PackageReference=J1-0603, Packaging="Cut Tape (CT)", Part Status=Active, Pricing 1="1=0.1, 10=0.028, 100=0.0119, 1000=0.00557, 2500=0.0049, 5000=0.00411 (USD)", Published=8-Jun-2000, Publisher="Altium Limited", RoHS="RoHS Compliant", Size / Dimension="0.039\" L x 0.020\" W (1.00mm x 0.50mm)", Stock 1=0, Supplier 1=Digi-Key
R10 R11 R12 R14 R15: "Resistor", Manufacturer=Yageo, Manufacturer Part Number=AC0402JR-071RL, Operating Temperature="-55°C ~ 155°C", Package / Case="0402 (1005 Metric)", Power (Watts)="0.063W, 1/16W", Supplier Device Package=0402, Supplier Part Number 1=YAG3527CT-ND, Temperature Coefficient=±200ppm/°C, Tolerance=±5%, Category=Resistors, ComponentLink1Description=http://www.yageo.com/NewPortal/yageodocoutput?fileName=/pdf/R-Chip/PYu-AC_51_RoHS_L_6.pdf, ComponentLink1URL=http://www.yageo.com/NewPortal/yageodocoutput?fileName=/pdf/R-Chip/PYu-AC_51_RoHS_L_6.pdf, Composition="Thick Film", Failure Rate=-, Features="Automotive AEC-Q200, Moisture Resistant", Height - Seated (Max)="0.015\" (0.37mm)", LatestRevisionDate=29-May-2009, LatestRevisionNote="IPC-7351 Footprint Added.", PackageDescription="Chip Resistor", PackageReference=J1-0603, Packaging="Cut Tape (CT)", Part Status=Active, Pricing 1="1=0.1, 10=0.026, 100=0.0104, 1000=0.00469, 2500=0.00407, 5000=0.00336 (USD)", Published=8-Jun-2000, Publisher="Altium Limited", RoHS="RoHS Compliant", Size / Dimension="0.039\" L x 0.020\" W (1.00mm x 0.50mm)", Stock 1=19312, Supplier 1=Digi-Key
R16 R17: library part CMP-009-00158-3, "Chip Resistor, 4,7 kOhms, +/-1 %, 63 mW, -55 to 155 degC, 0402", Case/Package=0402, Max Operating Temperature=155°C, Min Operating Temperature=-55°C, Power=63mW, Tolerance=1%, Pins=2
SW1: library part CMP-011-00004-2, "Tactile Switch, SPST-NO, 0.05 A, 24 V, -25 to 70 degC, 4-Pin THD, RoHS, Bulk", Contact Current Rating=50mA, Manufacturer="Omron Electronic Components", Max Contact Resistance=100mohm, Max Operating Temperature=70°C, Max Voltage Rating (DC)=24V, Min Operating Temperature=-25°C, Operating Force=100gf, Package Description="4-Pin Through Hole Device, Body 6 x 6 mm", Package Quantity=1500, Resistance=0.1Ohm, Case/Package=B3F-1000, Contact Material=Gold, Contact Plating=Gold, Current Rating=50mA, Datasheet URL=http://www.omron.com/ecb/products/pdf/en-b3f.pdf, Datasheet Version=Jan-15, Manufacturer URL=http://www.omron.com/, Max Current Rating=50mA, Mounting Technology=TH, Package Reference=B3F-1000, Packaging=Bulk, Pins=4, RoHS Compliant=True, Throw Configuration=SPST, Voltage Rating=24V, Voltage Rating (DC)=24V
SW2: library part "PTS810 SJM 250 SMTR LFS", "SWITCH TACTILE SPST-NO 0.05A 16V", Contact Rating @ Voltage="0.02A @ 15VDC", Illumination Type, Color=-, Manufacturer=C&K, Manufacturer Part Number="KXT 331 LHS", MPN=DHT-4235A, Operating Force=240gf, Operating Temperature="-40°C ~ 85°C", Supplier Part Number 1=CKN10502CT-ND, Actuator Height off PCB, Vertical=0.60mm, Actuator Length, Right Angle=-, Actuator Material=-, Actuator Orientation="Top Actuated", Actuator Type=Standard, Category=Switches, Circuit=SPST-NO, ComponentLink1Description=https://www.ckswitches.com/media/1465/kxt3.pdf, ComponentLink1URL=https://www.ckswitches.com/media/1465/kxt3.pdf, ComponentLink2Description=https://www.ckswitches.com/media/1476/pts810.pdf, ComponentLink2URL=https://www.ckswitches.com/media/1476/pts810.pdf, Features=-, Illumination=Non-Illuminated, Illumination Voltage (Nominal)=-, Ingress Protection=-, Mechanical Life="500,000 Cycles", Mounting Type="Surface Mount", Outline="3.00mm x 2.00mm", Packaging="Cut Tape (CT)", Part Status=Active, Pricing 1="1=0.3, 10=0.287, 25=0.2768, 50=0.267, 100=0.2521, 250=0.23728, 500=0.2274, 1000=0.17302 (USD)", RoHS="RoHS Compliant", Stock 1=220949, Supplier 1=Digi-Key, Switch Function=Off-Mom, Switch Travel=0.13mm, Termination Style="SMD (SMT) Tab"
U1: library part TLV1117LV33DCYR, "IC REG LINEAR 3.3V 1A SOT223-4", Current - Output=1A, Manufacturer="Texas Instruments", Operating Temperature="-40°C ~ 125°C", Package / Case="TO-261-4, TO-261AA", Supplier Device Package=SOT-223-4, Supplier Part Number 1=296-28778-1-ND, Voltage - Input (Max)=5.5V, Voltage - Output (Max)=-, Voltage - Output (Min/Fixed)=3.3V, Voltage Dropout (Max)="1.3V @ 800mA", Base Part Number=TLV1117LV33, Category="Integrated Circuits (ICs)", ComponentLink1Description=http://www.ti.com/lit/ds/symlink/tlv1117lv.pdf, ComponentLink1URL=http://www.ti.com/lit/ds/symlink/tlv1117lv.pdf, Control Features=-, Manufacturer Part Number=TLV1117LV33DCYR, Mounting Type="Surface Mount", Output Configuration=Positive, Output Type=Fixed, Packaging="Cut Tape (CT)", Part Status=Active, Pricing 1="1=0.68, 10=0.598, 100=0.4586, 500=0.36256, 1000=0.29005 (USD)", Protection Features="Over Current, Over Temperature", PSRR="75dB (120Hz)", RoHS="RoHS Compliant", Stock 1=20855, Supplier 1=Digi-Key
U2: library part LP5907MFX-1.2/NOPB, "IC REG LINEAR 1.2V 250MA SOT23-5", Current - Output=250mA, Manufacturer="Texas Instruments", Operating Temperature="-40°C ~ 125°C", Package / Case="SC-74A, SOT-753", Supplier Device Package=SOT-23-5, Supplier Part Number 1=296-39062-1-ND, Voltage - Input (Max)=5.5V, Voltage - Output (Max)=-, Voltage - Output (Min/Fixed)=1.2V, Voltage Dropout (Max)="0.25V @ 250mA", Category="Integrated Circuits (ICs)", ComponentLink1Description=http://www.ti.com/lit/ds/symlink/lp5907.pdf, ComponentLink1URL=http://www.ti.com/lit/ds/symlink/lp5907.pdf, Control Features=Enable, Manufacturer Part Number=LP5907MFX-1.2/NOPB, Mounting Type="Surface Mount", Output Configuration=Positive, Output Type=Fixed, Packaging="Cut Tape (CT)", Part Status=Active, Pricing 1="1=0.55, 10=0.475, 100=0.3547, 500=0.27872, 1000=0.21537 (USD)", Protection Features="Over Temperature, Short Circuit", PSRR="90dB ~ 60dB (100Hz ~ 100kHz)", RoHS="RoHS Compliant", Stock 1=65117, Supplier 1=Digi-Key
U3: library part CMP-001-0000-1, "8Digits Tape & Reel (TR) 8x (7Segment) 64LED SERIAL display driver 350muA 5.5V 8.66mm -40C~85C"
U4 U5 U6 U7: library part CMP-009-000000-1, ".56IN. 7 SEGMENT SINGLE DISPLAY, 565NM GREEN, GRAY FACE, WHITE SEGMENTS, COMMON", Package=None, Check_prices=https://www.snapeda.com/parts/LDS-C512RI/Lumex/view-part/?ref=eda, Component Type=Standard, Design Item ID=LDSC512RI, MF=Lumex, MP=LDS-C512RI, Pin Count=10, SnapEDA_Link=https://www.snapeda.com/parts/LDS-C512RI/Lumex/view-part/?ref=snap, Source=LDSC512RI.SchLib
X1: library part CMP-014-000000-1, "Dip Switch SPST 4 Position Through Hole Slide (Standard) Actuator 25mA 24VDC", Manufacturer_Name=Apem, Mouser Part Number=642-NDI04HV, Datasheet Link=https://www.mouser.ca/datasheet/2/26/NDI_DM_DIPS-276092.pdf, Design Item ID=NDI04HV, Geometry.Height=5mm, Manufacturer_Part_Number=NDI04HV, Mouser Price/Stock=https://www.mouser.co.uk/ProductDetail/Apem/NDI04HV/?qs=4pzlT8jjbheYf%2FxKjHex%252BQ%3D%3D, Source=NDI04HV.SchLib

## Via types
v1: diameter 0.6, hole 0.3, Top Layer to Bottom Layer, 105 vias
v2: diameter 0.6, hole 0.3, Top Layer to Bottom Layer, tented bottom, 16 vias

## Nets (pads, with @x,y where several pads share a name; then routed paths per layer and width w, separated by ;. In a path a pad name is that pad's centre, name@x,y a point inside that pad or via, vN(x,y) a via of type N, cw(c..) or ccw(c..) an arc to the next point about the centre after c; other vN are vias at no path point)
5V: C3.2 U1.3 | length 5.2
  Top Layer w0.2: C3.2 69.543,66.894 69.543,66.394 71.561,64.375 U1.3
+1.2V: L2.1 R10.1 R11.1 | length 104.4
  Top Layer w0.4: R10.1 55.494,72.221 55.494,73.796 58.198,76.5 80.198,76.5 ; L2.1 83.598,68.25 83.448,68.4 83.448,68.5 80.198,71.75 80.198,76.5 ; R11.1 141.94,78.776 141.94,78.993 140.933,80 130.698,80 123.853,73.155 107.252,73.155 105.77,74.637 98.447,74.637 96.584,76.5 80.198,76.5
+3.3V: C1.2 C2.2 C14.2 D1.+ J1.1 L1.1 MEM1.8 OSC1.1 OSC1.4 R6.2 R7.2 R8.2 R9.2 R12.2 R13.2 R14.1 R15.2 R16.2 R17.2 SW1.1 U3.19 X1.1 X1.2 X1.3 X1.4 | length 55.4
  Top Layer w0.4: U3.19 45.637,91.318 45.822,91.133 48.133,91.133 v1(50,93) ; R16.2 v1(47.198,86.95) ; 55.821,94.104 v1(61.623,94.104) ; R13.2@60.537,59.036 61.735,59.036 v1(63.235,60.536) ; v1(64.198,90.5) R15.2 ; v1(71.698,69) 71.736,69.038 72.386,69.038 73.098,69.75 L1.1 ; D1.+ v1(95.262,84) ; v1(95.162,94.439) 95.198,94.475 OSC1.4 ; v1(95.17,100.57) 95.184,100.556 95.184,98.514 OSC1.1 ; 95.198,95.617 96.544,95.617 C1.2 ; v1(115,94.5) ccw(c115.075,94.5) 115.075,94.425 R6.2 ; v1(116,86.5) 116,87.339 cw(c117.698,87.339) R8.2 ; v1(116,89.5) cw(c117.575,89.5) 117.575,91.075 R7.2 ; v1(117.5,84.5) 117.5,84.554 117.698,84.752 R9.2 ; R12.2 122.198,74.5 v1(123.198,75.5) ; MEM1.8 123.238,86.681 123.419,86.5 v1(125.198,86.5) 124.698,86 C2.2 ; R14.1 v1(143.198,85)
  Bottom Layer w0.4: C14.2 89.181,83.463 89.707,82.937 v1(89.707,82.892) ; v1@89.707,83 v1@89.752,83
CDONE: FPGA1.7 J1.7 | length 79.9
  Top Layer w0.2: v1(74.5,82.5) 73.71,83.29 73.71,86.093 73.827,86.21 76.758,86.21 78.048,87.5 FPGA1.7
  Bottom Layer w0.2: v1(74.5,82.5) 74.423,82.423 73.923,82.423 72.198,80.698 72.198,77.617 72.315,77.5 73.198,77.5 84.698,66 110,66 111.507,64.493 114.148,64.493 117,61.641 117,58 116.5,57.5 114.54,57.5 J1.7
CRESET_B: FPGA1.8 J1.2 R13.1 SW2.2 | length 92.3
  Top Layer w0.2: R13.1@60.537,59.961 59.262,59.961 SW2.2 59.333,60.26 59.333,60.833 60.5,62 65,62 71.229,55.771 94.883,55.771 95,55.889 95,63.198 ; v1(78.063,86.157) 78.906,87 FPGA1.8 ; v1(89.698,68.5) 95,63.198 ; J1.2@104.158,63.04 95.158,63.04 95,63.198
  Bottom Layer w0.2: v1(78.063,86.157) 78.123,86.096 78.123,85.146 78,85.023 78,79 88.5,68.5 v1(89.698,68.5)
DIG0: U3.2 U4.3 | length 26.2
  Top Layer w0.2: v1(28,112.5) U4.3 ; v1(33.5,94.5) 34.142,93.858 U3.2
  Bottom Layer w0.2: v1(28,112.5) 28,100 v1(33.5,94.5)
DIG1: U3.3 U5.3 | length 69.7
  Top Layer w0.2: v1(31.5,93.5) 31.608,93.5 31.886,93.223 U3.3 ; v1(57.5,112.5) 59.88,112.5 U5.3@60.38,112
  Bottom Layer w0.2: v1(31.5,93.5) 31.5,96.005 26.5,101.005 26.5,118.355 28.152,120.007 49.993,120.007 v1(57.5,112.5)
DIG2: U3.4 U6.3 | length 102.5
  Top Layer w0.2: v1(29.588,92.588) U3.4 ; v1(87,112.5) U6.3
  Bottom Layer w0.2: v1(29.588,92.588) 29.588,97.423 26,101.01 26,118.35 28.15,120.5 79,120.5 v1(87,112.5)
DIG3: U3.5 U7.3 | length 137
  Top Layer w0.2: v1(30,90.5) 31.453,91.953 U3.5 ; v1(117.5,112.5) U7.3
  Bottom Layer w0.2: v1(30,90.5) 28.5,92 28.5,97.5 25.5,100.5 25.5,118.345 28.005,120.85 109.15,120.85 v1(117.5,112.5)
DIG4: U3.7
DIG5: U3.8
DIG6: U3.9
DIG7: U3.10 | length 1.1
  Top Layer w0.2: U3.10@35.223,88.822 35.238,88.806 36.269,88.806 U3.10
FLASH_MISO: MEM1.2
FLASH_MOSI: MEM1.5
GND: C1.1 C2.1 C3.1 C4.1 C5.1 C6.1 C7.1 C8.1 C9.1 C10.1 C11.1 C12.1 C13.1 C14.1 C15.1 C16.1 C17.1 C18.1 FPGA1.0 J1.3 J1.5 J1.9 MEM1.4 OSC1.2 R1.2 R2.2 R3.2 R4.2 R5.2 SW2.3 U1.1 U2.2 U2.4 U3.6 | length 83
  Top Layer w0.2: v1(24.198,63) R2.2 ; v1(29.698,58.5) 29.698,61.35 31.198,62.85 R3.2 ; v1(33,90) 34.318,91.318 U3.6 ; v1(34.698,58.5) 34.198,59 34.198,61 35.094,61.896 35.094,62.5 R5.2 ; 39.198,59 40.148,59.95 R4.2 ; v1(53,57.5) 53.425,57.925 SW2.3 ; C8.1 58.698,70.802 v1(59.5,70) ; v1(66.198,92.5) 66.261,92.437 66.798,92.437 C17.1 ; v1(68.198,70.5) 69.198,69.5 C3.1 ; v1(72.698,73.5) 74.161,73.5 C5.1 ; C4.1 78.122,70.185 79.122,70.185 v1(79.198,70.262) ; U1.1 77.623,64.5 v1(79.698,64.5) ; v1(85.698,60.302) U2.2 ; U2.4 86.648,65.271 86.823,65.446 87.498,65.446 87.598,65.346 v1(88.198,65.346) ; C7.1 87.079,72.919 v1(91.47,72.919) ; C6.1 89.145,71.471 89.293,71.471 v1(89.369,71.547) ; v1(91,99) 91.5,98.5 OSC1.2 ; C1.1@96.687,94.526 96.719,94.494 96.719,94.105 v1(97.833,92.991) ; C12.1 113.217,74.981 v1(115.179,74.981) v1@115.198,75 ; v1(117.198,96.73) 117.275,96.653 117.529,96.653 119.428,94.754 MEM1.4 ; v1(123.5,83) 124.009,83.509 124.17,83.509 C2.1 ; v1(133.5,75.819) C10.1 ; v1(135,83.264) C15.1 ; R1.2 138.248,61.55 v1(139.198,62.5)
  Bottom Layer w0.2: v1(76,88) 76.5,88.5 C9.1 ; v1(76.292,90.339) 76.4,90.339 76.74,90 C18.1 ; C13.1 86.539,81.998 86.539,80.485 v1(86.579,80.445) ; C14.1 88.198,82 v1(89.198,81) ; C16.1@90.161,89 90.186,88.975 91.063,88.975 91.207,89.118 v1(92.192,89.118) ; 91.963,87 93.5,87 v1(94,87.5)
  other v1: 38.698,58.5
  other v2: 83.423,86.1 84.523,86.1 85.623,86.1 86.723,86.1 83.423,87.2 84.523,87.2 85.623,87.2 86.723,87.2 83.423,88.3 84.523,88.3 85.623,88.3 86.723,88.3 83.423,89.4 84.523,89.4 85.623,89.4 86.723,89.4
ICE_CLK: FPGA1.35 OSC1.3 | length 11.6
  Top Layer w0.2: FPGA1.35 89.198,90 89.315,90.117 89.315,92.071 v1(89.263,92.123) ; v1(92,92.5) 93.254,93.754 93.254,96.956 OSC1.3
  Bottom Layer w0.2: v1(89.263,92.123) 89.763,91.623 91.623,91.623 91.923,91.923 91.923,92.423 v1(92,92.5)
ICE_MISO: FPGA1.14 J1.8 | length 60
  Top Layer w0.2: v1(77,81) 77.033,81.033 77.033,81.416 79.117,83.5 82.476,83.5 82.802,83.827 82.802,84.354 FPGA1.14 ; v1(82.198,73) 83.452,74.254 93.394,74.254 93.511,74.137 93.511,72.313 v1(91.198,70) ; J1.8@111.778,63.04 v1(111.778,65.92)
  Bottom Layer w0.2: v1(77,81) 77,78.5 82.125,73.375 82.125,73.073 v1(82.198,73) ; v1(91.198,70) 94.198,67 110.698,67 v1(111.778,65.92)
ICE_MOSI: FPGA1.17 J1.6 | length 44
  Top Layer w0.2: v1(81.96,81.762) 82.068,81.762 82.383,82.077 82.767,82.077 84.302,83.611 FPGA1.17@84.302,84 ; v1(96.946,74.125) 97.008,74.187 105.512,74.187 109.238,70.46 J1.6@109.238,63.04
  Bottom Layer w0.2: v1(81.96,81.762) 82.036,81.686 82.036,81.162 87.655,75.544 96.785,75.544 96.946,75.383 v1(96.946,74.125)
ICE_SCK: FPGA1.15 J1.4 MEM1.6 R6.1 | length 83.5
  Top Layer w0.2: v1(79.5,80.5) 79.5,82 80.65,83.15 82.62,83.15 83.298,83.828 83.298,84.35 FPGA1.15 ; v1(82,78) 87.998,78 88.498,78.5 v1(88.5,78.5) ; v1(91.5,79.5) 99.222,79.5 103.272,75.45 106.95,75.45 107,75.5 v1(108.198,75.5) 108.275,75.577 108.775,75.577 v1(115.698,82.5) 114.5,83.698 v1(114.5,84.5) 114.5,90.302 R6.1 ; v1(106.755,71.198) 106.755,71.09 106.96,70.884 J1.4 ; v1(120.698,85) MEM1.6
  Bottom Layer w0.2: v1(79.5,80.5) v1(82,78) ; v1(88.5,78.5) 90.5,78.5 v1(91.5,79.5) ; v1(106.755,71.198) 106.863,71.198 107.061,71.396 107.094,71.396 108.198,72.5 v1(108.198,75.5) ; v1(115.698,82.5) 118.198,82.5 v1(120.698,85)
ICE_SS: FPGA1.16 J1.10 MEM1.1 R9.1 | length 114.1
  Top Layer w0.2: v1(80.5,82) 81.3,82.8 82.849,82.8 83.802,83.753 83.802,84.354 FPGA1.16 ; v1(103.5,76) 103.423,76.077 103.15,76.077 98.083,81.144 98.083,81.309 104.697,87.923 104.923,87.923 v1(105,88) ; J1.10@114.318,63.04 v1(114.318,65.88) ; R9.1 118.011,87.149 118.177,87.149 118.9,87.873 122.068,87.873 122.522,88.327 123.954,88.327 124.346,88.719 124.346,92.747 124.14,92.953 124.14,93.598 MEM1.1 123.238,95.46 v1(122.698,96)
  Bottom Layer w0.2: v1(80.5,82) 80.5,81.056 86.892,74.664 95.116,74.664 101.234,68.546 105.175,68.546 ; v1(103.5,76) 105.175,74.325 105.175,68.546 ; v1(105,88) v1(115.5,98.5) 120.198,98.5 v1(122.698,96) ; v1(114.318,65.88) 114.318,68.426 114.198,68.546 105.175,68.546
IOB_2A_N: FPGA1.47
IOB_2A_P: FPGA1.44
IOB_4A_N: FPGA1.48
IOB_4A_P: FPGA1.45
IOB_8A_N: FPGA1.4
IOB_8A_P: FPGA1.3
MODE_SEL: FPGA1.9 R2.1 X1.8 | length 70.1
  Top Layer w0.2: R2.1 28.748,63.15 27.837,64.061 27.759,64.061 26.198,65.622 26.198,70.5 29.198,73.5 29.198,74 ; X1.8 37.118,81 74.185,81 79.685,86.5 FPGA1.9
NetD1_2: D1.- FPGA1.24 | length 4
  Top Layer w0.2: FPGA1.24 87.823,84.039 87.846,84.015 87.95,84.015 87.965,84 D1.-
NetMEM1_3: MEM1.3 R8.1 | length 12.5
  Top Layer w0.2: MEM1.3 v1(120.698,96.143)
  Bottom Layer w0.2: 117.698,90 116.315,90 116.198,90.117 116.198,94 118.341,96.143 v1(120.698,96.143)
NetMEM1_7: MEM1.7 R7.1 | length 30.6
  Top Layer w0.2: R7.1 118.698,93 118.698,93.713 118.693,93.718 118.693,94.431 117.483,95.64 116.558,95.64 115.531,96.667 115.531,96.833 116.698,98 125.081,98 125.198,97.883 125.198,88.803 124.268,87.873 122.71,87.873 122.256,87.419 122.249,87.419 121.968,87.138 MEM1.7
PROG_SEL0: FPGA1.19 R5.1 X1.6 | length 68.8
  Top Layer w0.2: R5.1 37.694,63.996 40.198,66.5 40.198,69 X1.6 38.698,77.5 78.902,77.5 85.198,83.796 85.198,83.9 85.323,84.025 FPGA1.19
PROG_SEL1: FPGA1.20 R4.1 X1.5 | length 65.7
  Top Layer w0.2: R4.1 42.248,69.49 X1.5 40.738,77 79.198,77 85.802,83.604 85.802,84.354 FPGA1.20
SCL_AS111: FPGA1.23 R16.1 U3.14 | length 98.8
  Top Layer w0.2: U3.14 43.581,88.143 45.673,86.05 R16.1 45.873,85.9 49.773,83 v1(72.698,83) 72.721,83.023 72.721,87.502 v1(72.744,87.525) ; FPGA1.23 87.344,84.354 87.344,83.816 89.66,81.5 96.5,81.5 103.698,88.698 v1(103.698,91.5)
  Bottom Layer w0.2: v1(72.744,87.525) 72.699,87.57 72.699,91.699 74.917,93.917 92.281,93.917 94.698,91.5 v1(103.698,91.5)
SDA_AS111: FPGA1.25 R17.1 U3.1 | length 92.3
  Top Layer w0.2: U3.1 35.373,94.493 33,96.866 33,98.883 33.117,99 42.698,99 45.698,96 55.821,96 ; R17.1 56.796,93.204 56.5,93.5 56.436,93.5 55.821,94.115 55.821,96 ; FPGA1.25 94,85 94.5,85.5 96.5,85.5 97,86 97.601,86 97.719,86.117 97.719,87.781 94.5,91 91.117,91 91,91.117 91,94.5 89.5,96 55.821,96
SEGA: U3.15 U4.7 U5.7 U6.7 U7.7 | length 125.4
  Top Layer w0.2: U3.15 45.114,88.778 45.392,88.5 v1(45.5,88.5) ; U4.7 53.136,109.96 53.995,110.819 74.761,110.819 U5.7 82.886,109.96 83.745,110.819 104.761,110.819 U6.7 113.386,109.96 114.245,110.819 135.761,110.819 U7.7
  Bottom Layer w0.2: v1(45.5,88.5) 47.5,88.5 51.5,92.5 51.5,99 45,105.5 45,108.84 U4.7
SEGB: U3.17 U4.6 U5.6 U6.6 U7.6 | length 125.4
  Top Layer w0.2: U3.17 49.452,90.048 v1(51,88.5) ; U4.6 53.136,107.42 53.995,106.561 74.761,106.561 U5.6 82.886,107.42 83.745,106.561 104.761,106.561 U6.6 113.386,107.42 114.245,106.561 135.761,106.561 U7.6
  Bottom Layer w0.2: U4.6 52.5,101.04 52.5,90 v1(51,88.5)
SEGC: U3.20 U4.4 U5.4 U6.4 U7.4 | length 135
  Top Layer w0.2: U4.4 31.739,109.101 59.521,109.101 U5.4 67.886,109.96 68.745,109.101 89.521,109.101 U6.4 97.886,109.96 98.745,109.101 120.521,109.101 U7.4 ; U3.20 46.453,91.953 v1(49,94.5)
  Bottom Layer w0.2: U4.4 32.5,108.34 32.5,107 29.5,104 29.5,102 36.65,94.85 40.864,94.85 41.514,95.5 45.5,95.5 47,94 48.5,94 v1(49,94.5)
SEGD: U3.23 U4.2 U5.2 U6.2 U7.2 | length 127.7
  Top Layer w0.2: U4.2 38.386,115.04 39.245,114.181 59.521,114.181 U5.2 67.886,115.04 68.745,114.181 89.521,114.181 U6.2 97.886,115.04 98.745,114.181 120.521,114.181 U7.2 ; U3.23 42.858,93.858 43.5,94.5 43.5,96 v1(42,97.5)
  Bottom Layer w0.2: U4.2 33.5,112.42 33.5,107 30.5,104 30.5,102 32.5,100 39.5,100 v1(42,97.5)
SEGDP: U3.22 U4.5 U5.5 U6.5 U7.5 | length 122.4
  Top Layer w0.2: U4.5 38.386,107.42 39.245,108.279 59.521,108.279 U5.5 67.886,107.42 68.745,108.279 89.521,108.279 U6.5 97.886,107.42 98.745,108.279 120.521,108.279 U7.5 ; U3.22 43.723,93.223 44.95,94.45 v1(45,94.45)
  Bottom Layer w0.2: U4.5 29,105.54 29,102 36.5,94.5 44.466,94.5 v1(45,94.45)
SEGE: U3.21 U4.1 U5.1 U6.1 U7.1 | length 129.5
  Top Layer w0.2: U4.1 38.503,117.58 39.362,118.439 59.521,118.439 U5.1 68.003,117.58 68.862,118.439 89.521,118.439 U6.1 98.003,117.58 98.862,118.439 120.521,118.439 U7.1 ; U3.21 45.088,92.588 v1(47.5,95)
  Bottom Layer w0.2: U4.1 30.88,116.255 47.5,99.635 v1(47.5,95)
SEGF: U3.16 U4.9 U5.9 U6.9 U7.9 | length 136.9
  Top Layer w0.2: U3.16 47.587,89.413 v1(49.5,87.5) ; U4.9 59.069,115.04 59.928,115.899 74.761,115.899 U5.9 82.886,115.04 83.745,115.899 104.761,115.899 U6.9 113.386,115.04 114.245,115.899 135.761,115.899 U7.9
  Bottom Layer w0.2: U4.9 47.46,115.04 53.5,109 53.5,88 53,87.5 v1(49.5,87.5)
SEGG: U3.18 U4.10 U5.10 U6.10 U7.10 | length 137.4
  Top Layer w0.2: U3.18 51.709,90.683 51.892,90.5 v1(55,90.5) ; U4.10 53.315,117.58 54.174,116.721 74.761,116.721 U5.10 83.065,117.58 83.924,116.721 104.761,116.721 U6.10 113.565,117.58 114.424,116.721 135.761,116.721 U7.10
  Bottom Layer w0.2: U4.10 55,108.7 v1(55,90.5)
SPEED_SEL: FPGA1.10 R3.1 X1.7 | length 72.2
  Top Layer w0.2: R3.1 33.298,63.15 32.798,63.65 32.648,63.65 31.587,64.712 27.906,64.712 27.84,64.778 27.815,64.778 27.698,64.895 27.698,70 31.698,74 X1.7 38.658,80 74,80 79.975,85.975 81.673,85.975 FPGA1.10
STEP_BTN: FPGA1.12 R1.1 SW1.3 | length 80.7
  Top Layer w0.2: v1(80,84.5) 80.077,84.577 80.925,84.577 81.348,85 FPGA1.12 ; v1(120.698,71) 120.698,64.999 124.5,61.197 124.5,58 125.25,57.25 SW1.3 127.197,57.001 127.197,56.484 127.198,56.483 127.198,55.117 127.315,55 135.198,55 136.198,56 R1.1
  Bottom Layer w0.2: v1(80,84.5) 87.5,77 108.278,77 114.278,71 v1(120.698,71)
VCC: C8.2 C9.2 FPGA1.5 FPGA1.30 R10.2 | length 51.6
  Top Layer w0.2: R10.2 C8.2 58.094,72.321 58.094,72.397 58.697,73 v1(61.698,73) ; v1(80.5,88.5) FPGA1.5 ; FPGA1.30 89.95,87.5 v1(90,87.55)
  Bottom Layer w0.2: v1(61.698,73) 61.698,74.5 73.698,86.5 76.667,86.5 77.95,87.784 78.601,87.784 78.885,88.067 78.885,88.422 C9.2 v1(80.5,88.5) 81,88 81,84.117 81.117,84 88.883,84 89.062,84.179 89.062,84.905 89.143,84.986 89.143,85.045 89.143,86.693 v1(90,87.55)
VCC_1.2V: C6.2 C7.2 L2.2 U2.5 | length 15.3
  Top Layer w0.2: L2.2 84.631,66.75 84.748,66.633 ; U2.5 84.748,66.633 ; C7.2 86.122,73.463 84.748,72.088 84.748,66.633 ; C6.2@87.922,69.546 85.009,66.633 84.748,66.633
VCC_3.3V: C4.2 C5.2 L1.2 U1.2 U1.4 U2.1 U2.3 | length 39.4
  Top Layer w0.2: L1.2 73.298,68.25 73.548,68 73.548,67.9 75.198,66.25 ; C5.2 75.198,71.537 75.198,66.25 ; U1.4 76.148,57.625 77.273,56.5 83.5,56.5 83.5,60.973 84.748,62.221 U2.1 ; U1.2 75.198,66 ; 76.698,67.5 75.198,66 ; 83.5,56.568 87.883,56.568 88,56.685 88,60.869 86.648,62.221 U2.3 ; 75.198,66 75.198,66.25
VCC_PLL: C10.2 C11.2 FPGA1.29 R11.2 | length 57.7
  Top Layer w0.2: 89,87 89.173,87 89.315,86.859 89.315,86.801 v1@90.22,85.895 ; v1(133.253,78.555) 133.857,77.951 134.631,77.951 135.839,79.159 136.632,79.159 136.84,78.952 136.84,78.876 C10.2 R11.2
  Bottom Layer w0.2: v1(90.5,86) 90.5,86.032 91.317,86.85 91.387,86.85 91.468,86.93 91.468,87 91.688,86.78 91.688,86.771 92.467,85.992 92.467,85.617 92.584,85.5 95.198,85.5 102.143,78.555 v1(133.253,78.555)
VCCIO_0: C15.2 C16.2 FPGA1.33 R14.2 | length 59.7
  Top Layer w0.2: FPGA1.33 88.469,89.021 89.07,89.021 90.122,90.073 90.122,90.15 90.29,90.318 v1(90.29,90.427) ; 132.896,84.896 133.099,85.099 133.189,85.099 133.275,85.185 133.275,85.275 133.5,85.5 137.161,85.5 C15.2 R14.2
  Bottom Layer w0.2: C16.2 89.533,89.126 89.533,89.67 90.363,90.5 93.5,90.5 103,81 129.198,81 v1(133.198,85)
VCCIO_1: C12.2 C13.2 FPGA1.22 R12.1 | length 45.8
  Top Layer w0.2: FPGA1.22 86.823,83.398 v1(85.301,81.877) 85.301,79.61 86.359,78.552 86.525,78.552 87.973,80 88.5,80 90,78.5 96.5,78.5 99.913,75.087 105.956,75.087 107.005,74.037 C12.2 113.631,73.605 115.911,73.605 116.806,74.5 R12.1
  Bottom Layer w0.2: v1(85.301,81.877) 85.257,81.921 85.257,82.554 85.815,83.112 86.351,83.112 C13.2 C13.2@86.602,83.065
VCCIO_2: C17.2 C18.2 FPGA1.1 R15.1 | length 18
  Top Layer w0.2: R15.1 67.452,90.5 68.056,89.896 69.132,89.896 69.34,90.103 69.34,90.179 C17.2 74,90.5 v1(74.5,91) ; v1(80.5,90) 80.99,90.49 81.516,90.49 FPGA1.1@81.535,90.51
  Bottom Layer w0.2: v1(74.5,91) 75.36,91.86 79.047,91.86 79.164,91.743 79.164,90.034 C18.2 v1(80.5,90)
pads on no net: FPGA1.2 FPGA1.6 FPGA1.11 FPGA1.13 FPGA1.18 FPGA1.21 FPGA1.26 FPGA1.27 FPGA1.28 FPGA1.31 FPGA1.32 FPGA1.34 FPGA1.36 FPGA1.37 FPGA1.38 FPGA1.39 FPGA1.40 FPGA1.41 FPGA1.42 FPGA1.43 FPGA1.46 SW1.2 SW1.4 SW2.1 SW2.4 U3.11 U3.12 U3.13 U3.24 U4.8 U5.8 U6.8 U7.8

## Polygon pours and split planes (outlines as drawn)
GND on GND Plane (split plane): 143.953,125.482 144.174,125.453 144.392,125.405 144.605,125.338 144.811,125.252 145.009,125.149 145.197,125.029 145.374,124.893 145.527,124.754 145.537,124.741 145.549,124.731 145.654,124.613 145.755,124.472 145.839,124.32 145.905,124.16 145.953,123.993 145.982,123.822 145.991,123.664 145.99,123.649 145.99,101 145.99,55.5 145.991,55.488 145.983,55.391 145.957,55.284 145.915,55.183 145.858,55.089 145.795,55.015 145.785,55.007 145.537,54.759 145.527,54.746 145.374,54.607 145.197,54.471 145.009,54.351 144.811,54.248 144.605,54.162 144.392,54.095 144.174,54.047 143.953,54.018 143.747,54.009 143.73,54.01 24.27,54.01 24.253,54.009 24.047,54.018 23.826,54.047 23.608,54.095 23.395,54.162 23.189,54.248 22.991,54.351 22.803,54.471 22.626,54.607 22.473,54.746 22.463,54.759 22.215,55.007 22.205,55.015 22.142,55.089 22.085,55.183 22.043,55.284 22.017,55.391 22.009,55.488 22.01,55.5 22.01,123.23 22.009,123.247 22.018,123.453 22.047,123.674 22.095,123.892 22.162,124.105 22.248,124.311 22.351,124.509 22.471,124.697 22.607,124.874 22.746,125.027 22.759,125.037 22.769,125.049 22.887,125.154 23.028,125.255 23.18,125.339 23.34,125.405 23.507,125.453 23.678,125.482 23.836,125.491 23.851,125.49 143.73,125.49 143.747,125.491